# Altium PCB FLX5.PcbDoc (part 2 of 4)
Units mm, origin at the board's own origin, x right, y up, seen from the top; angles counter-clockwise.
Board outline 45.2 x 54.5 mm, 4 copper layers (Top Layer, gndplane, vplane, Bottom Layer), stack 1.596 mm thick; 151 components, 82 nets, 455 pads, 132 vias.
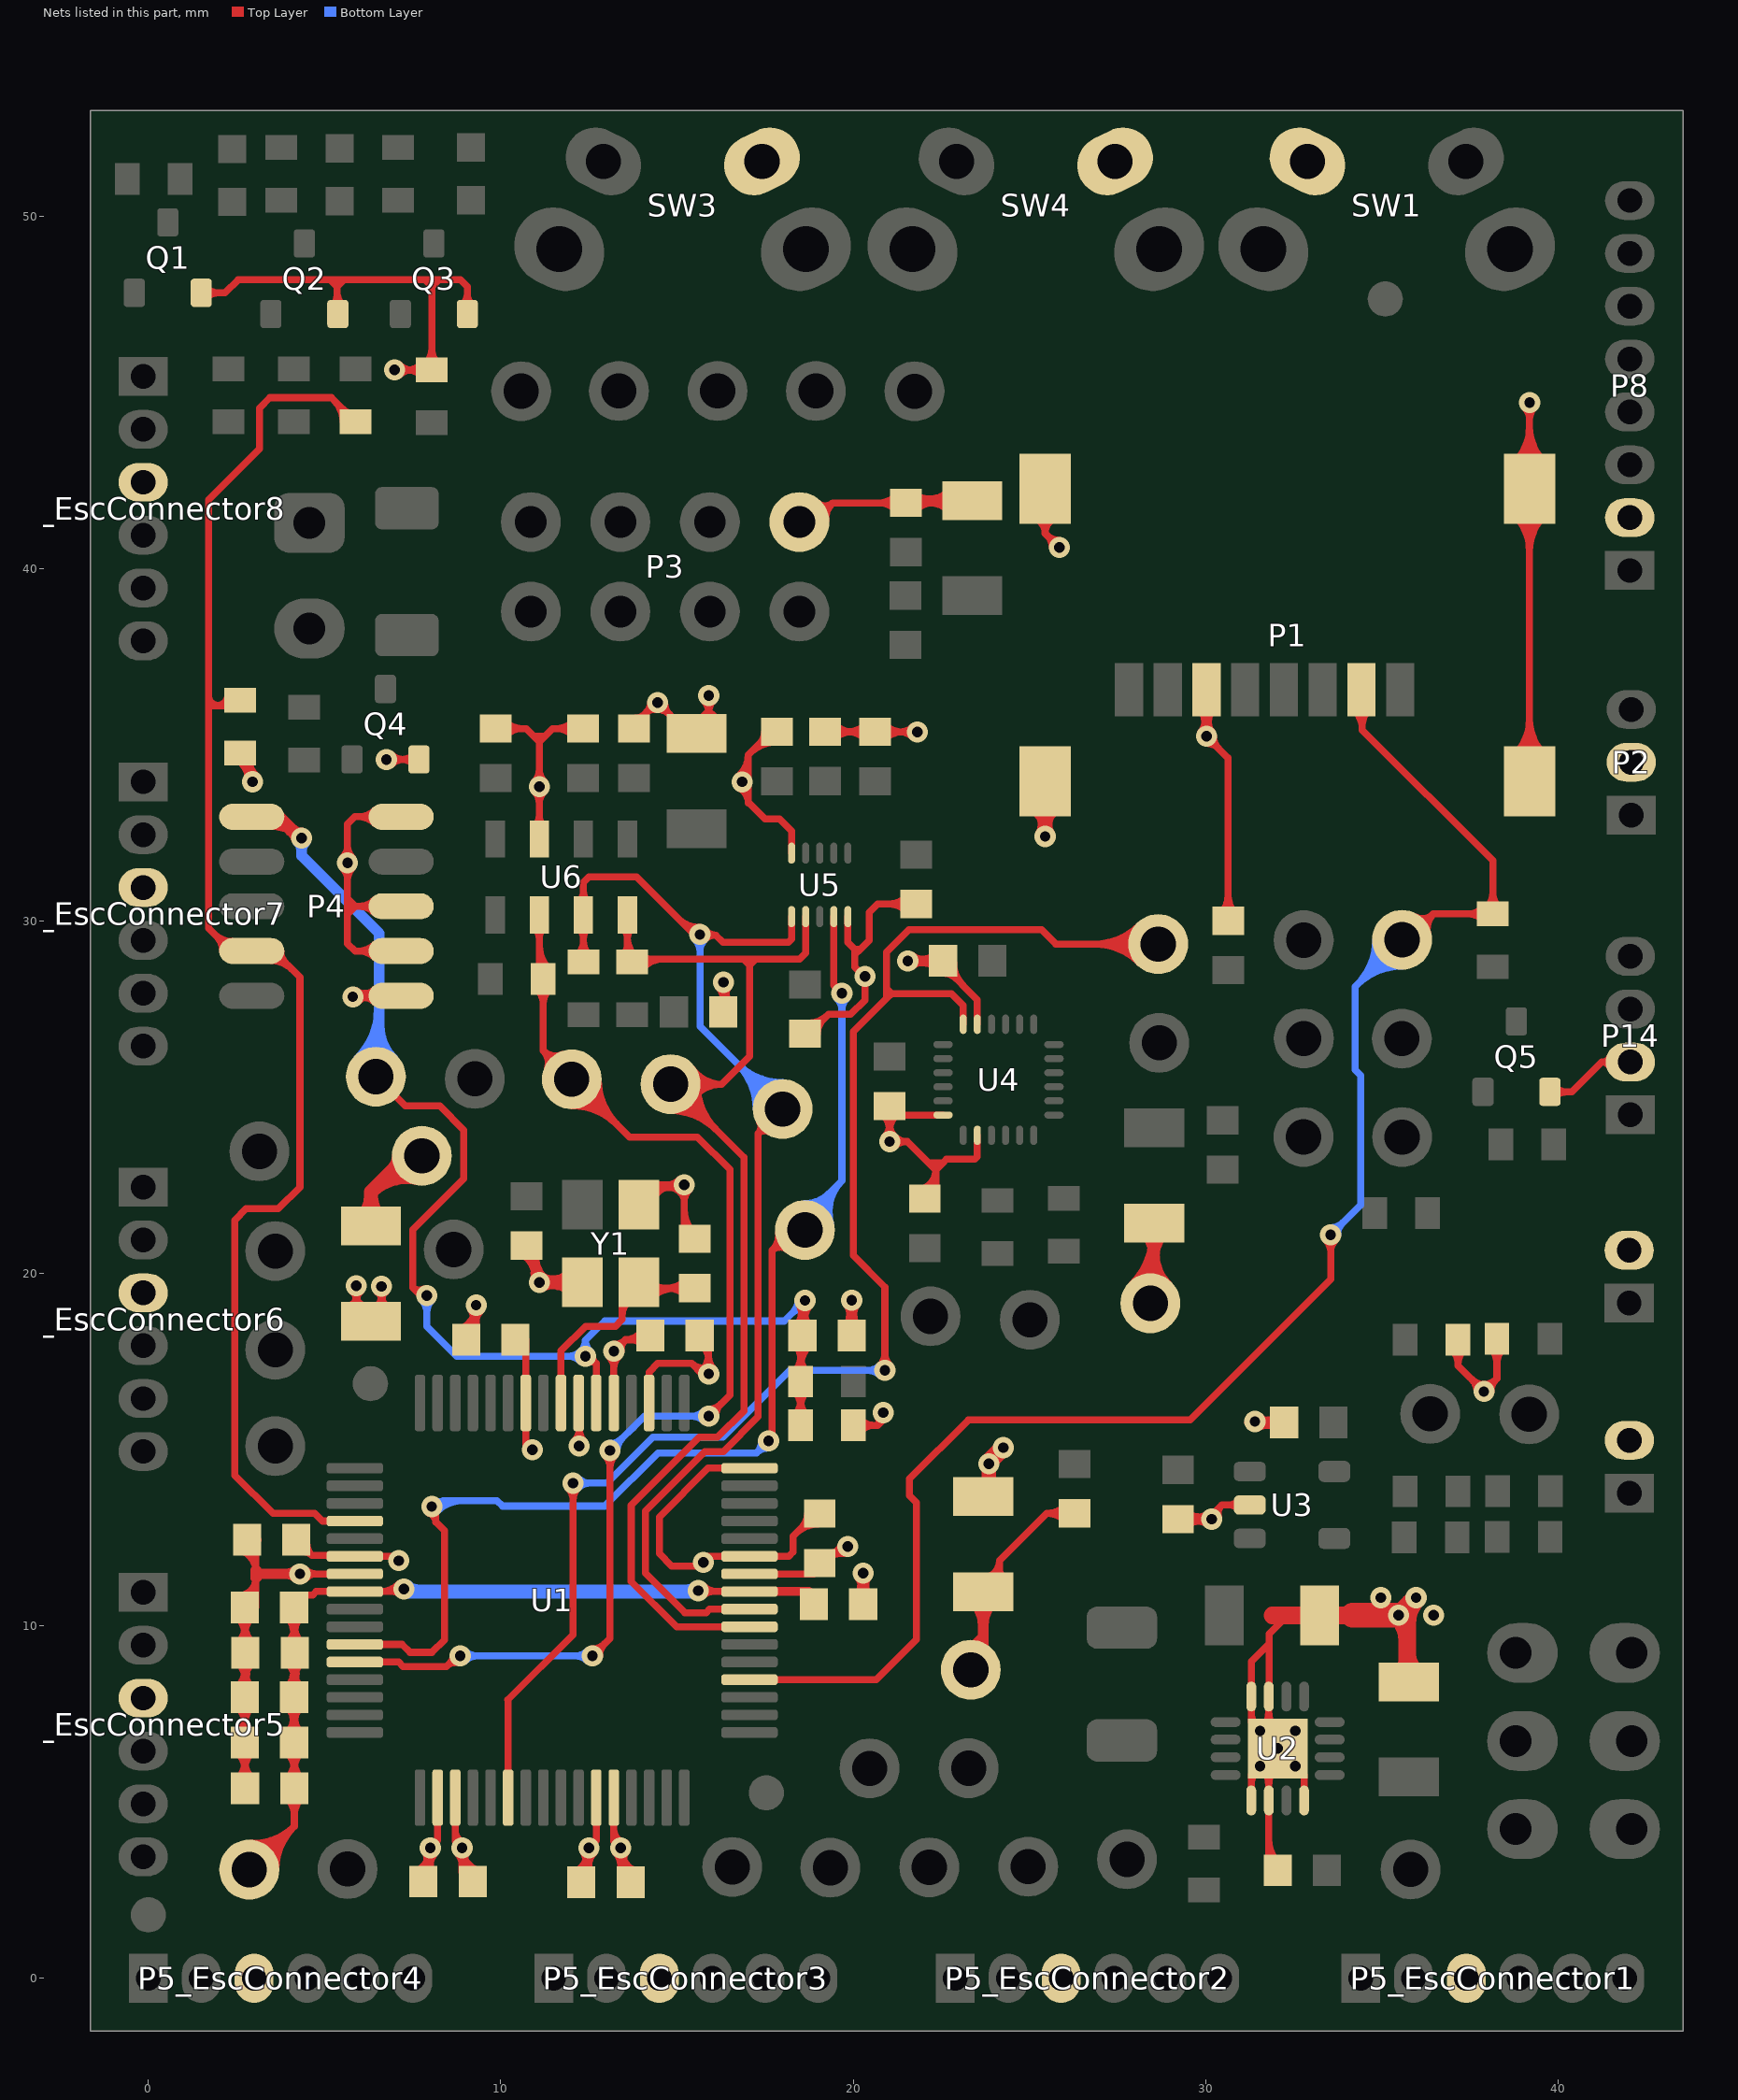
[diagram p4: the nets of this part, all layers, seen from the top]

## Via types
v1: diameter 0.6, hole 0.3, Top Layer to Bottom Layer, 132 vias

## Nets (pads, with @x,y where several pads share a name; then routed paths per layer and width w, separated by ;. In a path a pad name is that pad's centre, name@x,y a point inside that pad or via, vN(x,y) a via of type N, cw(c..) or ccw(c..) an arc to the next point about the centre after c; other vN are vias at no path point) (continued)
DBGLED2: P4.4 R13.2 R15.2 U1.52 | length 46.1
  Top Layer w0.2: 1.707,36.35 ccw(c1.972,36.388) R15.2@2.227,36.307 ; 1.874,29.626 ccw(c2.376,30.128) P4.4@2.376,29.418 ; 1.932,29.568 cw(c1.512,29.148) P4.4@2.106,29.148 ; 2.112,36.112 ccw(c2.112,36.55) R15.2@2.465,36.292 ; R15.2@2.556,36.112 1.718,36.112 1.706,36.1 ; P4.4@3.486,28.878 cw(c3.486,28.067) 4.06,28.64 ; P4.4@3.756,29.148 ccw(c4.248,29.148) 3.9,28.8 ; 5.278,44.761 cw(c4.68,44.164) R13.2@5.525,44.164 ; 5.519,44.52 ccw(c5.775,44.776) R13.2@5.775,44.414 ; U1.52@5.858,12.975 4.939,12.975 4.721,13.192 3.531,13.192 2.45,14.274 2.45,21.512 2.774,21.836 3.686,21.836 4.3,22.45 4.3,28.4 3.552,29.148 P4.4@2.931,29.148 2.882,29.099 2.401,29.099 1.706,29.794 1.706,36.1 ; R13.2@5.875,44.164 5.189,44.85 3.45,44.85 3.15,44.55 3.15,43.4 1.706,41.956 1.706,36.1
GND: C1.2 C2.2 C3.2 C4.2 C5.2 C6.2 C7.2 C8.2 C9.2 C10.2 C11.2 C12.2 C13.2 C14.2 C15.2 C16.2 C17.2 C18.2 C19.2 C20.2 C21.2 C22.2 C23.2 C24.2 C28.2 C29.2 C30.2 C31.1 C32.2 C33.2 C34.2 C35.2 C36.2 C37.2 C38.2 C39.2 C40.2 C41.2 C42.2 JP1.2 MCUG.1 P1.6 P1.MOUNT1 P1.MOUNT2 P1.MOUNT3 P1.MOUNT4 P2.2 P3.1 P4.3 P4.5 P4.9 P5_EscConnector1.3 P5_EscConnector2.3 P5_EscConnector3.3 P5_EscConnector4.3 P5_EscConnector5.3 P5_EscConnector6.3 P5_EscConnector7.3 P5_EscConnector8.3 P8.2 P11.2 P13.2 P14.2 Q1.2 Q2.2 Q3.2 Q4.2 Q5.2 R6.2 R7.2 SENSG.1 SW1.2 SW3.1 SW4.1 U1.3 U1.12 U1.27 U1.32 U1.35 U1.39 U1.55 U2.5 U2.6 U2.8 U2.15 U2.16 U2.17 U3.2 U4.11 U4.18 U4.20 U5.5 U5.10 U6.3 Y1.2 Y1.4 | length 312.1
  Top Layer w0.2: Q1.2@1.5,47.825 2.175,47.825 2.55,48.2 5.15,48.2 ; Q1.2@1.641,47.684 cw(c1.983,47.342) 1.983,47.825 cw(c1.983,48.308) Q1.2@1.641,47.966 ; C4.2@2.52,7.72 cw(c2.004,7.203) 2.734,7.203 ; C4.2@2.52,8.244 ccw(c2.004,8.761) 2.734,8.761 ; C7.2@2.522,6.427 cw(c2.01,5.915) 2.734,5.915 cw(c3.458,5.915) C7.2@2.946,6.427 ; C7.2@2.522,6.952 ccw(c2.01,7.464) 2.734,7.464 ccw(c3.458,7.464) C7.2@2.946,6.952 ; C9.2@2.522,10.263 cw(c2.008,9.75) 2.734,9.75 ; C5.2@2.528,5.652 ccw(c2.031,6.148) 2.734,6.148 ; C6.2@2.538,8.977 cw(c2.064,8.503) 2.734,8.503 ; C6.2@2.538,9.501 ccw(c2.064,9.975) 2.734,9.975 ; C4.2@2.582,8.292 ccw(c2.392,8.622) 2.76,8.523 ; C9.2@2.662,10.866 ccw(c2.54,11.362) 3.05,11.362 C9.2@3.05,10.525 ; C16.2@2.674,12.119 cw(c2.411,11.537) 3.05,11.537 ; C9.2@2.71,10.672 ccw(c2.603,11.107) 3.05,11.107 ; 2.734,6.179 ccw(c3.48,6.179) C5.2@2.953,5.652 ; 2.734,7.212 cw(c3.452,7.212) C4.2@2.944,7.72 ; C4.2@2.734,8.427 cw(c3.513,8.427) C6.2@2.962,8.977 ; 2.734,8.752 ccw(c3.452,8.752) C4.2@2.944,8.244 ; 2.734,9.752 cw(c3.457,9.752) C9.2@2.946,10.263 ; 2.734,10.052 ccw(c3.513,10.052) C6.2@2.962,9.501 ; C9.2@2.734,10.525 2.734,9.239 C7.2@2.734,6.689 2.734,5.396 C5.2@2.74,5.389 ; C16.2@2.756,12.301 cw(c2.551,11.846) 3.05,11.846 ; C9.2@2.758,10.478 ccw(c2.666,10.851) C9.2@3.05,10.851 ; 2.793,8.648 ccw(c3.147,8.553) C4.2@2.919,8.267 ; 3.05,11.575 3.05,12.379 C16.2@3.113,12.442 ; v1(4.3,11.475) v1@4.401,11.375 ; v1@4.401,11.475 U1.55@5.858,11.475 ; v1@4.441,11.334 cw(c4.782,10.994) 4.782,11.475 ; v1@4.441,11.617 ccw(c4.784,11.959) 4.784,11.475 ; Q2.2@5.234,47.466 ccw(c4.953,47.747) 5.35,47.747 ; 5.35,47.868 ccw(c5.918,47.868) Q2.2@5.516,47.466 ; Q2.2@5.375,47.225 5.35,47.25 5.35,48 ; v1@5.509,31.509 cw(c5.167,31.167) 5.65,31.167 cw(c6.133,31.167) v1@5.791,31.509 ; v1@5.509,31.791 ccw(c5.167,32.133) 5.65,32.133 ccw(c6.133,32.133) v1@5.791,31.791 ; 5.764,30.418 5.875,30.418 ; P4.3@6.427,28.957 ccw(c5.966,28.496) 5.966,29.148 ccw(c5.966,29.8) P4.3@6.427,29.339 ; P4.5@6.427,30.227 ccw(c5.966,29.766) 5.966,30.418 ccw(c5.966,31.07) P4.5@6.427,30.609 ; P4.9@6.427,32.767 ccw(c5.966,32.306) 5.966,32.958 ccw(c5.966,33.61) P4.9@6.427,33.149 ; v1(6.753,34.585) Q4.2@7.677,34.585 ; v1@6.894,34.443 cw(c7.235,34.102) 7.235,34.585 cw(c7.235,35.068) v1@6.894,34.726 ; v1(6.986,45.636) JP1.2@8.04,45.636 8.04,48 ; v1@7.128,45.495 cw(c7.469,45.153) 7.469,45.636 cw(c7.469,46.119) v1@7.128,45.778 ; P4.3@7.173,29.148 5.865,29.148 5.65,29.363 5.65,30.193 ; P4.5@7.173,30.418 5.875,30.418 ; P4.9@7.173,32.958 5.858,32.958 5.65,32.75 v1(5.65,31.65) 5.65,30.643 ; Q4.2@7.536,34.443 ccw(c7.194,34.102) 7.194,34.585 ccw(c7.194,35.068) Q4.2@7.536,34.726 ; JP1.2@7.764,45.459 ccw(c7.337,45.033) 7.337,45.636 ccw(c7.337,46.24) JP1.2@7.764,45.813 ; JP1.2@7.864,45.813 ccw(c7.437,46.24) 8.04,46.24 ccw(c8.644,46.24) JP1.2@8.217,45.813 ; 8.04,48.032 8.04,48.2 ; 8.208,48.2 8.04,48.2 ; U1.3@8.708,5.125 8.708,3.892 v1(8.9,3.7) ; 8.715,4.102 ccw(c9.073,4.215) v1@9.041,3.841 ; v1@8.759,3.559 cw(c8.417,3.217) 8.9,3.217 cw(c9.383,3.217) v1@9.041,3.559 ; v1@8.845,3.508 cw(c8.788,3.305) 8.991,3.359 cw(c9.195,3.414) v1@9.044,3.561 ; C12.2@8.884,18.433 ccw(c8.557,19.1) v1(9.3,19.1) 9.3,18.397 C12.2@9.016,18.114 C12.2@9.264,18.114 ; C42.2@8.9,3.098 ccw(c9.329,3.098) C42.2@9.163,2.703 ; 8.9,3.399 ccw(c9.455,3.399) C42.2@9.24,2.887 ; Q3.2@8.909,47.466 ccw(c8.567,47.808) 9.05,47.808 ccw(c9.533,47.808) Q3.2@9.191,47.466 ; C12.2@8.972,18.254 ccw(c8.715,18.779) 9.3,18.779 ; Q3.2@9.05,47.225 9.05,48 8.85,48.2 8.24,48.2 8.04,48 ; C12.2@9.06,18.074 ccw(c8.872,18.458) C12.2@9.3,18.458 ; v1@9.147,18.972 cw(c8.94,18.798) 9.201,18.729 cw(c9.461,18.659) v1@9.368,18.912 ; v1@9.159,18.959 cw(c8.817,18.617) 9.3,18.617 cw(c9.783,18.617) v1@9.441,18.959 ; C42.2@9.186,2.721 8.9,3.007 v1(8.9,3.7) ; C42.2@9.318,3.072 cw(c9.581,3.7) v1(8.9,3.7) ; C40.2@9.851,35.459 10.717,35.459 10.935,35.242 ; C40.2@10.113,35.247 cw(c10.625,34.735) 10.625,35.459 cw(c10.625,36.184) C40.2@10.113,35.671 ; C18.2@10.612,20.541 cw(c10.126,19.824) v1@10.992,19.824 ; C18.2@10.724,20.706 cw(c10.382,20.201) 10.992,20.201 ; C18.2@10.73,20.789 10.992,20.528 10.992,19.848 v1(11.092,19.748) Y1.4@12.316,19.748 ; v1@10.919,19.848 ccw(c10.728,19.958) 10.941,20.015 ; v1@10.951,33.674 cw(c10.61,33.333) 11.092,33.333 cw(c11.575,33.333) v1@11.234,33.674 ; v1@10.951,33.957 ccw(c10.61,34.299) 11.092,34.299 ccw(c11.575,34.299) v1@11.234,33.957 ; U6.3@10.969,32.696 ccw(c10.67,32.994) 11.092,32.994 ccw(c11.515,32.994) U6.3@11.216,32.696 ; C18.2@10.992,20.472 ccw(c11.816,20.472) 11.233,19.889 ccw(c11.575,20.23) 11.575,19.748 ccw(c11.575,19.265) v1@11.233,19.606 ; U6.3@11.092,32.322 v1(11.092,33.816) 11.092,35.084 ; v1@11.192,19.574 cw(c11.467,19.097) 11.61,19.629 ; v1@11.192,19.921 ccw(c11.467,20.398) 11.61,19.866 ; v1@11.265,19.648 cw(c11.624,19.44) 11.517,19.841 ; v1@11.265,19.848 ccw(c11.624,20.055) 11.517,19.654 ; Y1.4@11.98,19.412 ccw(c11.169,18.601) 11.169,19.748 ccw(c11.169,20.894) Y1.4@11.98,20.084 ; C38.2@12.071,35.247 ccw(c11.559,34.735) 11.559,35.459 ccw(c11.559,36.184) C38.2@12.071,35.671 ; v1@12.084,15.241 ccw(c11.742,15.583) 12.225,15.583 ccw(c12.708,15.583) v1@12.366,15.241 ; Y1.4@12.121,19.553 ccw(c11.652,19.084) 11.652,19.748 ccw(c11.652,20.412) Y1.4@12.121,19.942 ; U1.39@12.173,15.639 cw(c12.047,15.513) 12.225,15.513 ; U1.39@12.208,16.325 12.225,16.308 v1(12.225,15.1) ; C38.2@12.333,35.459 11.467,35.459 11.25,35.242 ; 13.208,4.163 ccw(c13.863,4.163) v1(13.4,3.7) ; U1.12@13.208,5.125 13.208,3.892 v1(13.4,3.7) ; 13.218,4.164 ccw(c13.581,4.204) v1@13.541,3.841 ; v1@13.259,3.559 cw(c12.917,3.217) 13.4,3.217 cw(c13.883,3.217) v1@13.541,3.559 ; v1@13.334,3.511 cw(c13.25,3.269) 13.498,3.336 cw(c13.745,3.402) v1@13.551,3.569 ; C15.2@13.4,3.066 ccw(c13.826,3.066) C15.2@13.643,2.681 ; 13.4,3.383 ccw(c13.978,3.383) C15.2@13.729,2.862 ; C15.2@13.686,2.721 13.4,3.007 v1(13.4,3.7) ; C41.2@13.783,35.459 14.108,35.784 14.108,35.899 ; Y1.2@13.798,22.114 cw(c14.36,21.917) Y1.2@14.36,22.513 ; C15.2@13.815,3.042 cw(c14.129,3.7) v1(13.4,3.7) ; C41.2@13.833,35.759 ccw(c13.833,36.087) C41.2@14.065,35.855 ; Y1.2@13.881,22.513 v1(15.205,22.513) C17.2@15.205,21.286 ; C41.2@13.933,35.46 cw(c14.566,35.462) 14.118,35.909 ; Y1.2@13.986,22.048 cw(c14.642,21.819) 14.642,22.513 ; C41.2@14.082,35.627 cw(c14.26,35.747) 14.108,35.899 ; 14.137,35.928 ccw(c13.865,36.2) v1@14.25,36.2 ; Y1.2@14.175,21.982 cw(c14.924,21.721) v1@14.924,22.513 ; U1.35@14.208,16.325 14.208,17.204 14.454,17.45 15.413,17.45 15.713,17.15 v1(15.9,17.15) 15.9,18.089 C13.2@15.392,18.089 ; v1@14.421,36.002 ccw(c14.367,35.64) 14.108,35.899 ; Y1.2@14.438,22.28 cw(c14.776,22.011) v1@15.129,22.26 ; v1@14.45,36 cw(c14.45,35.517) 14.791,35.859 cw(c15.133,36.2) v1@14.65,36.2 ; v1(14.45,36.2) 15.328,35.322 C39.2@15.559,35.322 ; v1@14.458,36.249 14.108,35.899 ; 14.649,22.44 cw(c14.779,21.954) v1@15.084,22.354 ; C39.2@14.788,35.862 cw(c14.255,35.328) C39.2@15.009,35.323 ; 14.89,22.504 ccw(c14.83,22.73) v1@15.032,22.613 ; v1@15.064,22.655 cw(c14.722,22.996) 14.722,22.513 cw(c14.722,22.031) 15.064,22.372 cw(c14.722,22.031) 15.205,22.031 cw(c15.688,22.031) v1@15.347,22.372 ; C17.2@15.205,21.348 ccw(c15.817,21.348) C17.2@15.385,20.915 ; 15.205,21.831 ccw(c16.3,21.831) C17.2@15.526,21.057 ; 15.413,17.45 ccw(c15.719,17.755) v1@15.843,17.342 ; C39.2@15.584,35.123 15.9,35.438 15.9,35.96 ; C13.2@15.585,18.101 cw(c15.169,17.5) 15.9,17.5 ; C39.2@15.695,35.51 ccw(c15.303,35.96) 15.9,35.96 ; C39.2@15.7,35.75 15.7,35.761 15.9,35.96 ; v1@15.727,17.25 ccw(c15.162,17.716) 15.89,17.634 ; v1@15.758,17.291 ccw(c15.417,17.633) 15.9,17.633 ccw(c16.383,17.633) v1@16.041,17.291 ; v1@15.758,36.258 cw(c15.417,35.917) 15.9,35.917 cw(c16.383,35.917) v1@16.041,36.258 ; v1(15.9,36.4) 15.9,35.96 ; C39.2@16.05,35.784 16.05,35.81 15.9,35.96 ; v1@16.174,28.122 cw(c15.833,27.781) 16.316,27.781 cw(c16.799,27.781) v1@16.457,28.122 ; v1@16.225,28.085 cw(c16.064,27.771) 16.405,27.863 cw(c16.69,27.939) v1@16.467,28.133 ; C33.2@16.316,27.421 v1(16.316,28.264) ; v1@16.727,34.106 ccw(c16.251,34.716) 17.024,34.716 ; v1@16.762,33.769 cw(c16.558,33.35) 17.024,33.35 ; 17.024,33.67 ccw(c16.714,33.67) v1(16.85,33.949) ccw(c16.571,34.306) 17.024,34.306 ; U1.32@17.058,14.475 15.881,14.475 14.5,13.094 14.5,12.051 14.851,11.7 15.65,11.7 v1(15.75,11.8) 15.752,11.8 15.775,11.823 15.775,11.95 15.75,11.975 U1.27@17.058,11.975 18.175,11.975 18.3,12.1 18.3,12.55 C14.2@18.75,13 ; 17.085,34.776 cw(c17.783,34.077) C37.2@17.783,35.066 ; 17.349,35.04 ccw(c17.023,35.366) C37.2@17.483,35.366 ; C37.2@17.426,35.118 cw(c17.783,34.76) C37.2@17.783,35.266 ; C37.2@17.674,35.366 17.024,34.716 ; U5.5@18.251,31.925 18.251,32.557 17.908,32.9 17.5,32.9 17.024,33.376 17.024,34.716 ; 18.375,12.625 cw(c19,11.999) C14.2@19,12.884 ; P3.1@18.474,41.322 18.872,41.322 19.416,41.866 ; 18.535,12.785 ccw(c18.136,13.184) C14.2@18.7,13.184 ; C32.2@18.633,26.8 18.75,26.8 19.3,27.35 ; C32.2@18.687,27.1 ccw(c18.696,27.954) 19.3,27.35 ; P3.1@18.856,41.718 ccw(c19.062,41.931) 19.272,41.722 ; C32.2@18.983,26.8 cw(c19.546,26.8) 19.148,27.198 ; P3.1@18.995,41.862 ccw(c19.203,42.078) 19.416,41.866 ; C35.2@19.199,35.373 C34.2@20.622,35.366 v1(21.824,35.366) ; P3.1@19.223,41.362 cw(c19.883,41.398) 19.416,41.866 ; C35.2@19.46,35.16 cw(c19.969,34.646) 19.973,35.369 ; C35.2@19.462,35.584 ccw(c19.977,36.094) 19.974,35.369 ; C19.2@19.746,18.501 ccw(c19.234,19.013) 19.959,19.013 ccw(c20.683,19.013) C19.2@20.171,18.501 ; v1@19.806,19.111 cw(c19.503,18.853) 19.888,18.75 ; v1@19.817,19.099 cw(c19.476,18.758) 19.959,18.758 cw(c20.441,18.758) v1@20.1,19.099 ; 19.847,35.37 cw(c19.844,34.645) C34.2@20.359,35.155 ; 19.849,35.37 ccw(c19.852,36.093) C34.2@20.361,35.579 ; U5.10@19.851,30.125 19.851,29.399 20.05,29.2 20.05,29.05 ; v1@19.859,19.068 cw(c19.718,18.824) 19.99,18.897 ; 19.927,18.897 cw(c20.199,18.824) v1@20.059,19.068 ; C19.2@19.959,18.239 v1(19.959,19.241) ; 20.029,18.75 cw(c20.414,18.853) v1@20.111,19.111 ; 20.05,29.201 20.201,29.201 ; C8.2@20.072,10.873 ccw(c19.559,11.385) 20.284,11.385 ccw(c21.008,11.385) C8.2@20.496,10.873 ; v1@20.132,11.365 cw(c19.904,11.158) 20.202,11.079 ; v1@20.138,11.359 cw(c19.788,11.008) C8.2@20.284,11.008 ; v1@20.18,11.327 cw(c19.983,10.986) 20.363,11.088 ; 20.208,11.103 cw(c20.564,11.007) v1@20.38,11.327 ; C8.2@20.284,10.611 v1@20.284,11.5 ; C8.2@20.284,11.026 cw(c20.754,11.026) v1@20.421,11.359 ; 20.369,11.067 cw(c20.701,11.156) v1@20.435,11.373 ; v1@20.458,28.432 v1(20.336,28.432) ; C30.2@20.823,24.539 cw(c20.311,24.026) 21.035,24.026 cw(c21.759,24.026) C30.2@21.247,24.539 ; C34.2@20.884,35.154 cw(c21.397,34.642) 21.397,35.366 cw(c21.397,36.09) C34.2@20.884,35.578 ; v1@20.894,23.883 ccw(c20.552,24.225) 21.035,24.225 ccw(c21.518,24.225) 21.176,23.883 ccw(c21.518,24.225) 21.518,23.742 ccw(c21.518,23.259) v1@21.176,23.6 ; v1@20.935,23.915 ccw(c20.819,24.115) 21.043,24.055 ; 21.027,24.055 ccw(c21.251,24.115) v1@21.135,23.915 ; C2.2@21.233,41.653 ccw(c20.721,41.141) 20.721,41.866 ccw(c20.721,42.59) C2.2@21.233,42.078 ; C36.2@21.521,30.27 ccw(c21.009,29.758) 21.009,30.482 ccw(c21.009,31.206) C36.2@21.521,30.694 ; v1(21.55,28.868) C31.1@22.25,28.868 ; v1@21.679,28.715 cw(c21.957,28.388) 22.068,28.803 ; v1@21.679,29.02 ccw(c21.957,29.348) 22.068,28.933 ; v1@21.683,35.224 ccw(c21.341,34.883) 21.341,35.366 ccw(c21.341,35.849) v1@21.683,35.507 ; v1@21.691,28.726 cw(c22.033,28.385) 22.033,28.868 cw(c22.033,29.351) v1@21.691,29.009 ; C2.2@21.713,42.114 ccw(c22.157,42.774) 22.363,42.006 ; v1@21.723,28.768 cw(c21.93,28.648) 21.868,28.879 ; v1@21.723,28.968 ccw(c21.93,29.087) 21.868,28.856 ; C2.2@21.758,41.653 cw(c22.27,41.141) 22.27,41.866 cw(c22.27,42.59) C2.2@21.758,42.078 ; C36.2@21.783,30.482 20.69,30.482 20.458,30.25 20.458,29.455 20.204,29.201 20.201,29.201 ; C2.2@21.805,41.716 cw(c22.207,41.484) 22.087,41.932 ; C2.2@21.84,41.866 ccw(c21.84,43.168) C3.2@22.76,42.247 ; C28.2@21.973,22.402 ccw(c21.754,22.956) 22.35,22.956 C28.2@22.35,22.123 ; C28.2@22.046,22.216 ccw(c21.87,22.662) 22.35,22.662 ; 22.145,41.866 cw(c22.145,40.995) C3.2@22.76,41.611 ; 22.15,23.142 22.151,23.141 22.549,23.141 ; 22.323,41.866 ccw(c22.323,42.685) C3.2@22.902,42.106 ; 22.336,22.942 21.536,23.742 v1(21.035,23.742) C30.2@21.035,24.751 21.29,24.496 U4.18@22.549,24.496 ; C31.1@22.336,28.651 22.641,28.651 23.524,27.768 U4.11@23.524,27.071 ; C31.1@22.338,28.656 ccw(c21.826,28.144) 21.826,28.868 ccw(c21.826,29.592) C31.1@22.338,29.08 ; 22.35,22.942 22.549,23.141 ; C31.1@22.55,28.518 cw(c22.55,27.977) 22.932,28.36 ; C31.1@22.85,28.818 ccw(c23.758,28.818) 23.116,28.176 ; C3.2@23.305,41.514 22.953,41.866 C2.2@21.495,41.866 19.416,41.866 ; U4.20@23.524,23.921 23.524,23.316 23.45,23.242 22.65,23.242 22.549,23.141 ; P1.MOUNT2@25.06,33.197 cw(c24.431,32.4) v1(25.447,32.4) ; P1.MOUNT1@25.18,41.423 cw(c24.983,41.003) 25.447,41.003 ; P1.MOUNT2@25.184,33.355 cw(c24.756,32.812) 25.447,32.812 cw(c26.137,32.812) P1.MOUNT2@25.71,33.355 ; v1@25.273,32.5 ccw(c24.855,32.741) 25.322,32.866 ccw(c25.788,32.991) v1@25.547,32.573 ; v1@25.305,32.541 ccw(c24.964,32.883) 25.447,32.883 ccw(c25.929,32.883) v1@25.588,32.541 ; v1@25.347,32.573 ccw(c25.105,32.991) 25.572,32.866 ccw(c26.038,32.741) v1@25.62,32.5 ; P1.MOUNT2@25.447,33.963 v1(25.447,32.4) ; P1.MOUNT1@25.447,42.263 25.447,41.003 ; v1@25.65,40.6 ccw(c25.167,40.6) 25.509,40.941 ccw(c25.85,41.283) v1@25.85,40.8 ; P1.MOUNT1@25.713,41.423 ccw(c25.91,41.003) 25.447,41.003 ; P1.MOUNT2@25.833,33.197 ccw(c26.462,32.4) v1(25.447,32.4) ; v1(25.85,40.6) 25.447,41.003 ; C21.2@29.22,13.029 v1(30.177,13.029) 30.177,13.145 30.464,13.432 ; C21.2@29.482,12.817 cw(c29.994,12.305) 29.994,13.029 cw(c29.994,13.753) C21.2@29.482,13.241 ; 29.712,12.953 cw(c29.807,12.596) v1@30.047,12.877 ; 29.712,13.105 ccw(c29.807,13.462) v1@30.047,13.181 ; 29.809,12.979 ccw(c29.726,13.29) v1@30.004,13.129 ; 29.809,13.079 cw(c29.726,12.768) v1@30.004,12.929 ; P1.6@29.814,36.001 cw(c29.302,35.489) 30.027,35.489 cw(c30.751,35.489) P1.6@30.239,36.001 ; v1@29.874,35.371 ccw(c29.561,35.637) 29.958,35.744 ; v1@29.885,35.382 ccw(c29.544,35.724) 30.027,35.724 ccw(c30.509,35.724) v1@30.168,35.382 ; v1@29.927,35.414 ccw(c29.795,35.643) 30.049,35.574 ; 30.004,35.574 ccw(c30.258,35.643) v1@30.127,35.414 ; v1@30.027,35.041 cw(c30.027,34.558) 30.368,34.9 cw(c30.709,35.241) v1@30.227,35.241 ; P1.6@30.027,36.563 v1(30.027,35.241) 30.641,34.627 C1.2@30.641,30.005 ; v1@30.036,12.888 ccw(c29.694,12.546) 29.694,13.029 ccw(c29.694,13.512) v1@30.036,13.17 ; 30.095,35.744 ccw(c30.492,35.637) v1@30.179,35.371 ; v1@30.37,13.081 cw(c30.72,13.176) 30.464,13.432 ; C1.2@30.429,30.217 ccw(c29.916,30.729) 30.641,30.729 ccw(c31.365,30.729) C1.2@30.853,30.217 ; U3.2@30.957,13.308 ccw(c30.658,13.009) 30.658,13.432 ccw(c30.658,13.854) U3.2@30.957,13.555 ; v1@31.2,15.769 v1@31.35,15.769 ; U3.2@31.255,13.432 30.464,13.432 ; U2.5@31.296,5.046 31.296,5.771 v1(31.546,6.021) ; U2.5@31.296,5.462 cw(c32.046,5.462) v1(31.546,6.021) ; 31.296,5.528 cw(c32.144,5.528) U2.17@32.061,6.372 ; 31.296,7.563 ccw(c32.008,7.563) v1(31.546,7.021) ; U2.17@31.306,5.788 cw(c31.622,5.703) v1(31.546,6.021) ; v1(31.4,15.8) 31.381,15.8 v1@31.35,15.769 ; v1@31.5,15.627 cw(c31.737,15.215) C22.2@31.86,15.674 ; v1@31.541,15.658 cw(c31.809,15.391) 31.809,15.769 ; v1@31.541,15.941 ccw(c31.957,16.357) C22.2@31.957,15.769 ; v1@31.563,15.916 ccw(c31.722,16.029) 31.772,15.841 ; v1@31.573,15.7 cw(c31.823,15.556) 31.748,15.834 ; v1@31.573,15.9 ccw(c31.998,16.145) C22.2@31.871,15.671 ; C24.2@31.796,3.478 ccw(c32.411,3.478) C24.2@31.976,3.043 ; 31.796,3.961 ccw(c32.893,3.961) C24.2@32.117,3.185 ; U2.6@31.796,5.435 cw(c33.132,5.435) U2.17@32.187,6.38 ; U2.6@31.796,5.462 ccw(c31.046,5.462) v1(31.546,6.021) ; U2.17@31.796,6.271 U2.6@31.796,5.046 31.796,3.315 C24.2@31.832,3.278 ; U2.17@31.796,6.771 U2.15@31.796,7.996 ; 31.796,7.563 cw(c31.084,7.563) v1(31.546,7.021) ; U2.15@31.796,7.607 ccw(c33.132,7.607) U2.17@32.187,6.662 ; U2.15@31.8,8 31.8,9.5 ; C22.2@32.018,15.557 ccw(c31.506,15.045) 31.506,15.769 ccw(c31.506,16.493) C22.2@32.018,15.981 ; 32.2,10.175 31.8,9.775 31.8,9.5 ; C22.2@32.23,15.769 v1@31.35,15.769 ; v1(32.546,6.021) 32.796,5.771 U2.8@32.796,5.046 ; R6.2@36.99,17.848 cw(c36.563,17.421) 37.167,17.421 cw(c37.77,17.421) R6.2@37.344,17.848 ; R6.2@37.167,18.125 37.167,17.383 v1(37.9,16.65) 38.27,17.02 R7.2@38.27,18.15 ; v1@37.7,16.65 ccw(c37.217,16.65) 37.559,16.991 ccw(c37.9,17.333) 37.9,16.85 ccw(c37.9,17.333) 38.241,16.991 ccw(c38.583,16.65) v1@38.1,16.65 ; R7.2@38.093,17.874 cw(c37.666,17.447) 38.27,17.447 cw(c38.873,17.447) R7.2@38.446,17.874 ; P1.MOUNT3@38.755,34.68 ccw(c37.688,35.747) 39.197,35.747 ccw(c40.705,35.747) P1.MOUNT3@39.639,34.68 ; P1.MOUNT4@38.755,41.546 cw(c37.688,40.479) 39.197,40.479 cw(c40.705,40.479) P1.MOUNT4@39.639,41.546 ; P1.MOUNT4@38.755,42.98 ccw(c37.688,44.047) 39.197,44.047 ccw(c40.705,44.047) P1.MOUNT4@39.639,42.98 ; P1.MOUNT3@38.896,34.539 ccw(c38.171,35.264) 39.197,35.264 ccw(c40.223,35.264) P1.MOUNT3@39.497,34.539 ; P1.MOUNT4@38.896,41.688 cw(c38.171,40.962) 39.197,40.962 cw(c40.223,40.962) P1.MOUNT4@39.497,41.688 ; P1.MOUNT4@38.896,42.839 ccw(c38.171,43.564) 39.197,43.564 ccw(c40.223,43.564) P1.MOUNT4@39.497,42.839 ; v1@39.055,44.573 cw(c38.714,44.231) 39.197,44.231 cw(c39.679,44.231) v1@39.338,44.573 ; v1@39.186,44.725 v1(39.197,44.714) P1.MOUNT4@39.197,42.938 ; P1.MOUNT3@39.197,33.963 P1.MOUNT4@39.197,42.263 ; Q5.2@39.773,25.153 40.403,25.153 41.25,26 ; Q5.2@39.914,25.011 cw(c40.256,24.67) 40.256,25.153 cw(c40.256,25.636) Q5.2@39.914,25.294 ; P14.2@41.484,25.839 ccw(c41.25,25.75) 41.25,26 ; P14.2@41.484,26.161 cw(c41.25,26.25) 41.25,26 ; P14.2@42.054,26 41.25,26 ; 5.15,48.2 5.35,48.2 ; 5.15,48.2 5.35,48 ; 5.35,48 5.55,48.2 ; 5.35,48 5.35,48.2 ; 5.35,48.2 5.55,48.2 ; 5.55,48.2 7.84,48.2 ; 5.65,30.193 5.875,30.418 ; 5.65,30.193 5.65,30.643 ; 5.65,30.643 5.875,30.418 ; 7.84,48.2 8.04,48.2 ; 7.84,48.2 8.04,48 ; 10.935,35.242 11.092,35.084 ; 10.935,35.242 11.25,35.242 ; 11.092,35.084 11.25,35.242 ; 19.3,27.35 19.928,27.35 20.336,27.757 v1(20.336,28.432) ; 20.05,29.05 20.05,28.7 20.318,28.432 v1(20.336,28.432) ; 20.05,29.05 20.201,29.201 ; v1(31.546,7.021) 31.296,7.271 U2.16@31.296,7.996 31.296,8.996 31.8,9.5
  Top Layer w0.3: v1@4.194,11.369 ccw(c3.938,11.113) 3.938,11.475 ccw(c3.938,11.837) v1@4.194,11.581 ; v1(4.3,11.475) 3.163,11.475 ; SENSG.1@27.939,19.649 ccw(c26.48,21.108) C29.2@28.544,21.108 ; SENSG.1@28.152,19.437 ccw(c27.205,20.384) 28.544,20.384 ; C29.2@28.261,21.149 cw(c27.578,20.466) 28.544,20.466 cw(c29.509,20.466) C29.2@28.827,21.149 ; SENSG.1@28.392,18.854 28.544,19.006 C29.2@28.544,21.231 ; 28.544,20.579 ccw(c29.86,20.579) SENSG.1@28.929,19.649 ; 3.163,11.475 3.05,11.362 3.05,11.575 3.15,11.475 3.163,11.475
  Top Layer w0.4: C10.2@6.069,21.594 ccw(c5.471,22.192) 6.316,22.192 ccw(c7.161,22.192) C10.2@6.564,21.594 ; C10.2@6.308,21.355 C10.2@6.316,21.347 6.316,22.316 7.338,23.338 MCUG.1@7.758,23.338 ; 6.316,22.316 cw(c7.324,21.309) MCUG.1@7.622,22.702 ; 6.837,22.837 cw(c7.507,22.166) MCUG.1@7.706,23.093 ; 6.945,22.945 ccw(c6.553,23.338) MCUG.1@7.108,23.338 ; C11.2@23.692,13.668 23.851,13.827 v1@23.851,14.599
  Top Layer w0.5: v1@23.851,14.599 23.851,14.648 v1(24.261,15.058) v1@24.261,15.011 ; 31.9,10.3 C23.2@33.233,10.3 34.175,10.3 ; v1@35.44,10.265 cw(c34.76,9.585) 35.721,9.585 ; v1@35.446,10.3 35.721,10.575 C20.2@35.721,8.414 ; C20.2@35.559,8.626 ccw(c35.167,9.017) 35.721,9.017 ; 35.721,9.259 ccw(c36.616,9.259) C20.2@35.983,8.626 ; 35.721,10.066 cw(c36.709,10.066) v1@36.01,10.765 ; v1@35.721,10.461 cw(c36.012,10.461) v1@35.98,10.75
  Top Layer w0.7: 34.175,10.3 v1@35.446,10.3
  other v1: 32.046,6.521 32.546,7.021 35.475,10.3 36.475,10.3 34.975,10.8 35.975,10.8 20.28,11.5 23.85,14.6
I2C1SCL: R25.2 SCLo.1 U1.23 U5.7 U6.8 | length 44.7
  Top Layer w0.2: R25.2@13.455,29.014 ccw(c13.123,29.346) 13.592,29.346 ; U6.8@13.469,29.798 cw(c13.17,29.499) 13.592,29.499 cw(c14.015,29.499) U6.8@13.716,29.798 ; 13.592,29.536 ccw(c14.33,29.536) R25.2@13.808,29.014 ; U6.8@13.592,30.172 13.592,28.925 16.883,28.925 ; R25.2@14.008,28.661 cw(c14.647,28.022) 14.647,28.925 ; R25.2@14.008,29.014 ccw(c14.224,29.229) 14.224,28.925 ; SCLo.1@14.807,25.127 SCLo.1@15.063,25.127 ; SCLo.1@14.819,24.621 cw(c14.819,22.811) 16.099,24.091 cw(c17.38,25.371) SCLo.1@15.569,25.371 ; SCLo.1@14.819,24.821 cw(c14.819,23.494) 15.758,24.432 cw(c16.697,25.371) SCLo.1@15.369,25.371 ; SCLo.1@15.268,25.053 cw(c15.884,24.615) 15.884,25.371 cw(c15.884,26.127) SCLo.1@15.268,25.69 ; SCLo.1@15.431,24.937 cw(c16.271,24.34) 16.271,25.371 ; SCLo.1@15.431,25.806 ccw(c16.271,26.402) 16.271,25.371 ; U1.23@17.058,9.975 14.99,9.975 13.7,11.265 13.7,13.425 15.625,15.35 16.148,15.35 16.9,16.101 16.9,23.291 SCLo.1@15.063,25.127 ; U5.7@18.651,30.125 18.651,29.093 18.483,28.925 17.233,28.925 ; SCLo.1@15.063,25.127 SCLo.1@14.819,25.371 16.271,25.371 ; 16.271,25.371 17.058,26.158 17.058,28.75 ; 16.883,28.925 17.233,28.925 ; 16.883,28.925 17.058,28.75 ; 17.058,28.75 17.233,28.925
I2C1SDA: R26.2 SDAo.1 U1.24 U5.6 U6.7 | length 44.2
  Top Layer w0.2: R26.2@12.169,29.015 ccw(c11.75,29.434) 12.342,29.434 ; U6.7@12.219,29.798 cw(c11.92,29.499) 12.342,29.499 cw(c12.765,29.499) U6.7@12.466,29.798 ; U6.7@12.219,30.546 ccw(c11.92,30.844) 12.342,30.844 ccw(c12.765,30.844) U6.7@12.466,30.546 ; R26.2@12.342,28.838 U6.7@12.342,30.172 12.342,31.091 12.502,31.25 13.855,31.25 15.505,29.6 16.1,29.6 ; 12.342,29.449 ccw(c12.957,29.449) R26.2@12.522,29.015 ; 15.031,30.073 ccw(c15.65,30.692) v1@15.65,29.817 ; v1@15.791,29.476 cw(c16.092,29.175) 16.092,29.6 ; v1@15.806,29.742 ccw(c16.1,29.975) 16.1,29.6 ; U1.24@17.058,10.475 15.923,10.475 15.823,10.375 15.225,10.375 14.1,11.5 14.1,13.259 15.791,14.95 16.314,14.95 17.3,15.936 17.3,23.968 ; SDAo.1@17.345,24.298 cw(c17.105,24.163) 17.3,23.968 ; SDAo.1@17.63,24.013 ccw(c17.495,23.773) 17.3,23.968 ; SDAo.1@17.998,24.666 17.3,23.968 ; U5.6@18.251,30.125 18.251,29.493 18.158,29.4 16.3,29.4 16.1,29.6
  Bottom Layer w0.2: v1@15.509,29.476 cw(c15.167,29.134) 15.65,29.134 cw(c16.133,29.134) v1@15.791,29.476 ; v1(15.65,29.617) 15.65,27.015 SDAo.1@17.998,24.666 ; SDAo.1@17.248,24.666 ccw(c15.438,24.666) 16.718,25.947 ccw(c17.998,27.227) SDAo.1@17.998,25.416 ; SDAo.1@17.448,24.666 ccw(c16.121,24.666) 17.06,25.605 ccw(c17.998,26.544) SDAo.1@17.998,25.216
INT_ALT: INTa.1 JP2.1 U1.60 U6.6 | length 48.9
  Top Layer w0.2: U1.60@5.858,8.975 7.1,8.975 7.225,8.85 8.451,8.85 ; 8.574,8.973 ccw(c8.401,9.146) v1@8.646,9.146 ; v1@8.802,8.951 ccw(c8.718,8.583) 8.451,8.85 ; v1(8.846,9.146) 8.748,9.146 8.451,8.85 ; U6.6@10.969,29.798 cw(c10.67,29.499) 11.092,29.499 cw(c11.515,29.499) U6.6@11.216,29.798 ; JP2.1@11.026,28.073 cw(c10.599,27.646) 11.203,27.646 cw(c11.806,27.646) JP2.1@11.38,28.073 ; JP2.1@11.026,28.627 ccw(c10.866,28.787) JP2.1@11.092,28.787 ; JP2.1@11.092,28.4 U6.6@11.092,30.172 ; 11.092,28.837 ccw(c11.59,28.837) JP2.1@11.238,28.485 ; 11.092,29.32 ccw(c12.073,29.32) JP2.1@11.38,28.627 ; JP2.1@11.203,28.35 11.203,26.32 ; INTa.1@11.315,25.784 ccw(c10.849,25.966) 11.203,26.32 ; INTa.1@11.74,26.208 cw(c11.557,26.674) 11.203,26.32 ; INTa.1@12.013,24.76 cw(c12.013,22.949) 13.294,24.229 cw(c14.574,25.51) INTa.1@12.763,25.51 ; INTa.1@12.013,24.96 cw(c12.013,23.632) 12.952,24.571 cw(c13.891,25.51) INTa.1@12.563,25.51 ; v1(12.6,9.146) 13.1,9.646 v1(13.1,14.977) ; v1@12.6,9.346 ccw(c12.6,9.829) 12.941,9.488 ccw(c13.283,9.146) v1@12.8,9.146 ; v1@12.959,14.836 cw(c12.617,14.495) 13.1,14.495 cw(c13.583,14.495) v1@13.241,14.836 ; v1(15.9,15.95) 16.5,16.55 16.5,22.95 15.579,23.871 13.652,23.871 INTa.1@12.013,25.51 11.203,26.32 ; v1@15.9,16.15 ccw(c15.9,16.633) 16.241,16.291 ccw(c16.583,15.95) v1@16.1,15.95
  Bottom Layer w0.2: v1(8.846,9.146) 12.546,9.146 12.6,9.2 v1(12.6,9.146) ; v1@8.988,9.005 cw(c9.329,8.663) 9.329,9.146 cw(c9.329,9.629) v1@8.988,9.288 ; v1@12.459,9.005 ccw(c12.117,8.663) 12.117,9.146 ccw(c12.117,9.629) v1@12.459,9.288 ; v1(13.1,14.977) 14.073,15.95 v1(15.9,15.95) ; v1@13.1,15.177 ccw(c13.1,15.66) 13.441,15.319 ccw(c13.783,14.977) v1@13.3,14.977 ; 15.417,15.95 cw(c15.417,15.467) v1@15.758,15.808 ; 15.417,15.95 ccw(c15.417,16.432) v1@15.758,16.091
INT_IMU: INTIMU.1 U1.6 U4.12 | length 51.7
  Top Layer w0.2: U1.6@10.208,5.125 10.208,7.892 10.2,7.9 12.05,9.75 v1(12.05,14.05) ; v1@11.909,13.909 cw(c11.567,13.567) 12.05,13.567 cw(c12.533,13.567) v1@12.191,13.909 ; v1@20.759,17.391 ccw(c20.417,17.733) 20.9,17.733 ccw(c21.383,17.733) v1@21.041,17.391 ; v1(20.9,17.25) 20.9,19.617 20.004,20.513 20.004,26.86 20.95,27.806 ; U4.12@23.124,27.071 23.124,27.602 22.784,27.942 21.086,27.942 ; INTIMU.1@28.126,28.817 ccw(c26.845,27.536) 26.845,29.347 ccw(c26.845,31.157) INTIMU.1@28.126,29.877 ; INTIMU.1@28.267,28.958 ccw(c27.328,28.019) 27.328,29.347 ccw(c27.328,30.675) INTIMU.1@28.267,29.736 ; INTIMU.1@28.656,29.347 25.753,29.347 25.35,29.75 21.584,29.75 20.95,29.116 20.95,28.078 ; 20.95,27.806 20.95,28.078 ; 20.95,27.806 21.086,27.942 ; 20.95,28.078 21.086,27.942
  Bottom Layer w0.2: v1(12.05,14.05) 13.021,14.05 14.321,15.35 15.651,15.35 16.3,15.35 18.2,17.25 v1(20.9,17.25) ; v1@12.191,13.909 cw(c12.533,13.567) 12.533,14.05 cw(c12.533,14.533) v1@12.191,14.191 ; v1@20.759,17.109 ccw(c20.417,16.767) 20.417,17.25 ccw(c20.417,17.733) v1@20.759,17.391
INT_MAG: INTm.1 U1.59 U5.9 | length 42.3
  Top Layer w0.2: U1.59@5.858,9.475 7.2,9.475 7.425,9.25 8.048,9.25 8.401,9.603 8.401,12.7 8.15,12.951 8.15,13.276 v1(8.04,13.386) ; v1@7.97,13.199 cw(c7.871,12.938) 8.15,12.938 ; v1(17.6,15.25) 17.7,15.35 17.7,20.652 ; 17.852,20.804 cw(c18.069,20.586) INTm.1@18.271,20.819 ; INTm.1@17.885,21.164 cw(c17.247,21.105) 17.7,20.652 ; INTm.1@18.14,20.668 ccw(c17.928,20.424) 17.7,20.652 ; INTm.1@18.232,21.184 17.7,20.652 ; U5.9@19.451,30.125 19.451,28.179 ; v1@19.49,28.013 ccw(c19.337,28.064) 19.451,28.179 ; v1@19.617,28.14 cw(c19.565,28.293) 19.451,28.179 ; v1(19.68,27.95) 19.451,28.179
  Bottom Layer w0.2: v1@8.168,13.54 ccw(c8.262,13.656) 8.368,13.55 ; v1@8.182,13.244 cw(c8.919,12.507) 8.919,13.55 ; 8.437,13.55 ccw(c8.437,12.99) v1(8.04,13.386) 8.076,13.35 8.168,13.35 8.368,13.55 ; v1@17.4,15.25 cw(c16.917,15.25) 17.259,14.909 cw(c17.6,14.567) v1@17.6,15.05 ; v1(17.6,15.25) 17.25,14.9 14.457,14.9 12.957,13.4 10.043,13.4 9.893,13.55 8.368,13.55 ; INTm.1@18.232,21.184 19.68,22.632 ; INTm.1@18.632,21.984 ccw(c18.632,22.95) 19.315,22.267 ; INTm.1@18.97,21.324 cw(c19.788,21.542) 19.189,22.142 ; INTm.1@19.163,21.376 cw(c20.176,21.646) 19.435,22.387 ; INTm.1@19.356,21.427 cw(c20.563,21.749) 19.68,22.632 ; v1@19.538,27.809 cw(c19.197,27.467) 19.68,27.467 cw(c20.163,27.467) v1@19.821,27.809 ; v1(19.68,27.95) 19.68,22.632
MVDD: B2.2 C10.1 C11.1 C12.1 C13.1 C14.1 C15.1 C16.1 C42.1 MVDD.1 P4.1 R15.1 R16.1 U1.2 U1.11 U1.26 U1.37 U1.42 U1.54 | length 52.3
  Top Layer w0.2: R15.1@2.549,34.568 cw(c2.038,33.936) v1@2.85,33.936 ; R15.1@2.556,34.612 R15.1@2.85,34.612 ; R15.1@2.674,34.723 cw(c2.377,34.355) 2.85,34.355 ; v1(2.95,33.95) 2.95,33.849 2.85,33.949 R15.1@2.85,34.612 ; v1@3.082,34.1 cw(c3.531,34.612) R15.1@2.85,34.612 ; C16.1@4.197,12.442 4.639,12 ; C16.1@4.271,12.101 cw(c4.366,11.727) 4.639,12 ; C16.1@4.497,12.375 ccw(c4.986,12.346) 4.639,12 ; 5.026,12 cw(c5.026,11.793) U1.54@5.173,11.939 ; v1@5.722,27.878 P4.1@7.173,27.878 ; C10.1@5.724,19.1 ccw(c5.68,19.303) v1@5.777,19.488 ; v1(5.9,19.649) 5.9,19.063 C10.1@6.316,18.647 6.613,18.944 v1(6.613,19.633) ; v1@5.911,28.016 ccw(c6.152,28.379) P4.1@6.265,27.958 ; v1@5.941,27.709 cw(c6.35,27.3) P4.1@6.35,27.878 ; v1@5.941,27.991 ccw(c6.215,28.265) 6.215,27.878 ; v1@5.968,27.742 cw(c6.126,27.641) 6.175,27.822 ; v1@5.973,27.75 cw(c6.344,27.536) 6.233,27.95 ; v1@5.973,27.95 ccw(c6.184,28.072) 6.121,27.836 ; v1@6.025,19.487 ccw(c6.129,19.307) C10.1@6.1,19.1 ; P4.1@6.427,27.687 ccw(c5.966,27.226) 5.966,27.878 ccw(c5.966,28.53) P4.1@6.427,28.069 ; C10.1@6.437,19.084 ccw(c6.393,19.287) v1@6.49,19.472 ; v1@6.738,19.471 ccw(c6.842,19.291) C10.1@6.813,19.084 ; v1(7.1,11.85) 7.111,11.838 7.188,11.838 7.2,11.85 7.2,11.95 7.225,11.975 U1.54@5.858,11.975 5.833,12 4.639,12 ; C42.1@7.641,3.049 ccw(c7.23,3.7) v1(8,3.7) ; C42.1@7.748,2.88 ccw(c7.459,3.337) 8,3.337 ; C42.1@7.786,2.721 8,2.936 v1(8,3.7) ; v1@7.843,3.576 cw(c7.61,3.392) 7.897,3.315 cw(c8.184,3.238) v1@8.074,3.514 ; v1@7.859,3.559 cw(c7.517,3.217) 8,3.217 cw(c8.483,3.217) v1@8.141,3.559 ; U1.2@8.208,5.125 8.208,3.908 v1(8,3.7) ; C12.1@10.708,18.12 U1.42@10.708,16.325 10.708,15 v1(10.9,15) ; C15.1@12.127,3.026 ccw(c11.704,3.7) v1(12.5,3.7) ; C15.1@12.233,2.856 ccw(c11.931,3.339) 12.5,3.339 ; C15.1@12.286,2.721 12.5,2.936 v1(12.5,3.7) ; v1@12.34,3.58 cw(c12.08,3.386) 12.393,3.302 ; v1@12.359,3.559 cw(c12.017,3.217) 12.5,3.217 cw(c12.983,3.217) v1@12.641,3.559 ; 12.393,3.302 cw(c12.706,3.218) v1@12.579,3.516 ; U1.11@12.708,5.125 12.708,3.908 v1(12.5,3.7) ; v1@13.067,17.65 cw(c12.725,17.309) 13.208,17.309 cw(c13.691,17.309) v1@13.35,17.65 ; U1.37@13.208,16.325 v1(13.208,17.792) 13.536,18.12 ; v1@13.214,17.992 ccw(c13.227,18.429) 13.536,18.12 ; v1@13.408,17.798 cw(c13.845,17.81) 13.536,18.12 ; 13.672,18.12 cw(c13.672,17.613) C13.1@14.03,17.971 ; C13.1@13.997,18.357 cw(c13.536,18.686) 13.536,18.12 ; C13.1@14.242,18.12 13.536,18.12 ; U1.26@17.058,11.475 18.875,11.475 C14.1@19.05,11.65 ; C14.1@19.05,11.784 cw(c19.713,11.121) v1@19.826,12.051 ; C14.1@19.304,12.071 ccw(c19.359,12.359) v1@19.634,12.256 ; v1@19.8,12.2 v1(19.85,12.25) v1@20.006,12.25 ; R16.1@20.009,15.688 20.688,15.688 ; R16.1@20.185,15.512 cw(c20.612,15.085) 20.612,15.688 cw(c20.612,16.292) R16.1@20.185,15.865 ; v1@20.698,15.92 cw(c20.567,15.809) 20.688,15.688 ; v1(20.85,16.05) 20.85,15.85 20.688,15.688 ; C11.1@23.692,10.692 24.15,11.15 24.15,11.85 ; C11.1@23.832,11.388 ccw(c23.656,11.85) 24.15,11.85 ; C11.1@23.903,11.201 ccw(c23.766,11.56) 24.15,11.56 ; 24.15,11.671 ccw(c24.695,11.671) C11.1@24.31,11.286 ; B2.2@26.016,12.98 ccw(c25.504,12.468) 25.504,13.192 ccw(c25.504,13.916) B2.2@26.016,13.404 ; B2.2@26.278,13.192 25.492,13.192 24.15,11.85
  Top Layer w0.3: MVDD.1@23.237,8.762 23.237,9.237 23.692,9.692 ; MVDD.1@23.337,8.754 23.692,9.108 23.692,9.692 ; C11.1@23.409,10.685 cw(c22.726,10.002) 23.692,10.002 cw(c24.657,10.002) C11.1@23.974,10.685 ; C11.1@23.692,10.692 23.692,9.692
  Bottom Layer w0.2: v1@2.95,33.85 v1(2.95,33.95)
  other v1: 5.8,27.85
Net\RST_1: \RST.1 C19.1 P4.10 R16.2 R17.1 U1.38 | length 53.1
  Top Layer w0.2: \RST.1@6.455,25.583 7.288,24.75 8.266,24.75 8.95,24.066 8.95,22.687 7.502,21.238 7.502,19.603 ; v1@7.81,19.554 cw(c7.689,19.791) 7.502,19.603 ; v1@7.9,19.205 7.502,19.603 ; v1(12.4,17.65) 12.502,17.65 12.708,17.443 ; v1@12.495,17.474 cw(c12.581,17.316) 12.708,17.443 ; v1@12.6,17.65 ccw(c12.837,17.65) 12.669,17.482 ; U1.38@12.708,16.325 12.708,17.443 ; R17.1@18.332,16.656 cw(c17.905,16.229) 18.509,16.229 cw(c19.112,16.229) R17.1@18.685,16.656 ; R17.1@18.332,17.209 ccw(c17.905,17.636) 18.509,17.636 ccw(c19.112,17.636) R17.1@18.685,17.209 ; R16.2@18.332,15.965 ccw(c17.905,16.392) 18.509,16.392 ccw(c19.112,16.392) R16.2@18.685,15.965 ; C19.1@18.346,17.977 cw(c17.955,17.585) 18.509,17.585 ; C19.1@18.346,18.501 ccw(c17.639,19.208) v1@18.639,19.208 ; v1@18.459,19.133 cw(c18.001,18.868) 18.512,18.731 ; C19.1@18.488,18.359 ccw(c18.122,18.725) 18.639,18.725 ; v1@18.49,19.092 cw(c18.13,18.732) 18.639,18.732 ; R17.1@18.509,17.344 cw(c19.404,17.344) C19.1@18.771,17.977 ; C19.1@18.509,18.219 R16.2@18.509,15.688 R16.2@18.518,15.688 ; 18.529,18.796 cw(c18.949,18.683) v1@18.732,19.06 ; v1(18.632,19.233) 18.639,19.225 C19.1@18.639,18.239 ; 18.639,18.769 cw(c19.096,18.769) v1@18.773,19.092 ; 18.639,18.818 ccw(c19.088,18.818) C19.1@18.771,18.501
  Top Layer w0.3: P4.10@2.931,32.958 3.742,32.958 v1(4.35,32.35) ; P4.10@3.486,32.738 cw(c3.486,31.589) v1@4.299,32.401 ; 4.006,32.57 cw(c3.793,32.201) v1@4.205,32.311 ; 4.085,32.525 ccw(c4.234,32.783) v1@4.311,32.495 ; v1@4.2,32.35 ccw(c3.838,32.35) 4.094,32.606 ccw(c4.35,32.862) v1@4.35,32.5
  Bottom Layer w0.2: v1@7.758,19.234 cw(c7.417,18.893) 7.9,18.893 cw(c8.383,18.893) v1@8.041,19.234 ; v1(7.9,19.375) 7.9,18.5 8.75,17.65 v1(12.4,17.65) 12.4,18.1 ; v1@12.258,17.508 ccw(c11.917,17.167) 11.917,17.65 ccw(c11.917,18.133) v1@12.258,17.791 ; v1@12.266,17.798 ccw(c11.994,18.1) 12.4,18.1 ; v1@12.534,17.798 cw(c12.806,18.1) 12.4,18.1 ; v1@18.432,19.233 cw(c17.949,19.233) 18.29,18.892 cw(c18.632,18.55) v1@18.632,19.033 ; v1(18.632,19.233) 18.049,18.65 12.95,18.65 12.4,18.1
  Bottom Layer w0.3: v1@4.244,32.244 cw(c3.988,31.988) 4.35,31.988 cw(c4.712,31.988) v1@4.456,32.244 ; v1(4.35,32.35) 4.35,31.85 6.55,29.65 6.55,25.679 \RST.1@6.455,25.583 ; \RST.1@5.96,26.078 ccw(c4.534,27.503) 6.55,27.503 ; \RST.1@6.172,25.866 ccw(c5.259,26.779) 6.55,26.779 ; 6.55,27.043 ccw(c7.914,27.043) \RST.1@6.95,26.078
NetASS_1: ASS.1 P1.2 R1.1 U1.20 | length 56.5
  Top Layer w0.2: U1.20@17.058,8.475 20.657,8.475 21.8,9.617 21.8,13.495 21.6,13.695 21.6,14.176 23.274,15.85 29.563,15.85 33.55,19.837 v1(33.55,21.097) ; v1@33.409,20.955 cw(c33.067,20.614) 33.55,20.614 cw(c34.033,20.614) v1@33.691,20.955 ; P1.2@34.214,36.001 cw(c33.646,35.433) 34.45,35.433 ; P1.2@34.427,36.563 34.45,36.54 34.45,35.416 38.155,31.711 R1.1@38.155,30.201 36.466,30.201 ASS.1@35.728,29.463 ; 34.45,35.546 cw(c35.094,35.546) P1.2@34.639,36.001 ; ASS.1@35.842,29.95 ccw(c36.018,30.271) 36.278,30.012 ; ASS.1@35.938,30.125 ccw(c36.152,30.515) 36.466,30.201 ccw(c36.888,29.779) ASS.1@36.308,29.641 ; R1.1@37.878,30.024 ccw(c37.451,29.597) 37.451,30.201 ccw(c37.451,30.804) R1.1@37.878,30.378 ; R1.1@37.978,30.378 ccw(c37.551,30.804) 38.155,30.804 ccw(c38.759,30.804) R1.1@38.332,30.378
  Bottom Layer w0.2: v1(33.55,21.097) 34.4,21.947 34.4,25.622 34.25,25.772 34.25,28.139 ASS.1@35.578,29.467 ; v1@33.55,21.297 ccw(c33.55,21.78) 33.891,21.438 ccw(c34.233,21.097) v1@33.75,21.097 ; ASS.1@34.828,29.467 cw(c33.018,29.467) 34.298,28.187 cw(c35.578,26.907) ASS.1@35.578,28.717 ; ASS.1@35.028,29.467 cw(c33.7,29.467) 34.639,28.528 cw(c35.578,27.59) ASS.1@35.578,28.917
NetC4_1: C4.1 C5.1 C6.1 C7.1 C8.1 C9.1 U1.25 U1.56 VDDC.1 | length 42
  Top Layer w0.2: VDDC.1@2.879,3.433 ccw(c2.919,4.256) 3.502,3.673 ; VDDC.1@2.889,3.633 ccw(c2.949,4.865) 3.821,3.993 ; VDDC.1@2.898,3.832 ccw(c2.978,5.474) 4.14,4.312 ; VDDC.1@2.912,3.083 4.14,4.312 ; VDDC.1@3.412,3.083 cw(c4.619,3.083) 3.765,3.937 ; VDDC.1@3.612,3.083 cw(c5.302,3.083) 4.107,4.278 ; C4.1@3.92,7.72 cw(c3.404,7.203) 4.134,7.203 ; C4.1@3.92,8.244 ccw(c3.404,8.761) 4.134,8.761 ; C7.1@3.922,6.427 cw(c3.395,5.9) 4.14,5.9 ; C7.1@3.922,6.952 ccw(c3.41,7.464) 4.134,7.464 ccw(c4.858,7.464) C7.1@4.346,6.952 ; C9.1@3.922,10.263 cw(c3.408,9.75) 4.134,9.75 ; C5.1@3.928,5.127 cw(c3.416,4.615) 4.14,4.615 cw(c4.865,4.615) C5.1@4.353,5.127 ; C5.1@3.928,5.652 ccw(c3.416,6.164) 4.14,6.164 ccw(c4.865,6.164) C5.1@4.353,5.652 ; C6.1@3.938,8.977 cw(c3.464,8.503) 4.134,8.503 ; C6.1@3.938,9.501 ccw(c3.464,9.975) 4.134,9.975 ; C4.1@3.982,8.292 ccw(c3.792,8.622) 4.16,8.523 ; 4.134,7.212 cw(c4.852,7.212) C4.1@4.344,7.72 ; C4.1@4.134,8.427 cw(c4.913,8.427) C6.1@4.362,8.977 ; 4.134,8.752 ccw(c4.852,8.752) C4.1@4.344,8.244 ; 4.134,9.752 cw(c4.857,9.752) C9.1@4.346,10.263 ; 4.134,10.052 ccw(c4.913,10.052) C6.1@4.362,9.501 ; 4.14,5.93 cw(c4.843,5.93) C7.1@4.346,6.427 ; 4.193,8.648 ccw(c4.547,8.553) C4.1@4.319,8.267 ; U1.56@6.585,10.975 ccw(c6.585,11.714) v1@7.108,11.191 ; 6.949,10.975 cw(c6.949,10.749) v1@7.108,10.908 ; v1@7.25,10.975 7.251,10.976 7.251,11.176 7.25,11.176 v1(7.25,11.05) 7.175,10.975 U1.56@5.858,10.975 4.764,10.975 4.664,10.875 4.485,10.875 C9.1@4.134,10.525 4.134,9.239 C7.1@4.134,6.689 4.14,6.683 C5.1@4.14,5.389 4.14,4.312 ; v1(15.6,11) 15.6,11.149 15.775,10.975 U1.25@17.058,10.975 ; v1@15.741,10.858 cw(c16.022,10.578) 16.022,10.975 ; v1@15.741,11.141 ccw(c16.144,11.544) 16.144,10.975
  Top Layer w0.254: U1.25@17.058,10.975 C8.1@18.75,10.975
  Bottom Layer w0.2: v1@15.6,10.975 v1(15.6,11)
  Bottom Layer w0.4: v1(7.25,11.05) 7.25,11.076 7.251,11.076 7.251,10.976 7.25,10.975 v1@15.6,10.975 ; v1@7.321,11.121 ccw(c7.673,11.473) 7.673,10.975 ; 15.297,10.975 ccw(c15.297,11.302) v1@15.529,11.071
NetC17_1: C17.1 U1.40 Y1.1 | length 11.7
  Top Layer w0.2: U1.40@11.708,16.325 11.708,17.807 12.401,18.5 13.25,18.5 13.442,18.692 13.442,19.249 13.792,19.6 Y1.1@13.892,19.6 ; 13.442,18.799 cw(c13.995,18.799) Y1.1@13.942,19.349 ; 13.442,19.019 cw(c13.974,19.019) Y1.1@13.923,19.548 ; Y1.1@13.442,19.239 cw(c13.952,19.239) Y1.1@13.904,19.747 ; Y1.1@13.916,19.748 14.077,19.586 C17.1@15.505,19.586 ; Y1.1@14.11,19.428 cw(c14.49,19.048) Y1.1@14.49,19.586 ; Y1.1@14.11,19.817 ccw(c14.668,20.376) 14.668,19.586 ; Y1.1@14.251,19.287 cw(c14.973,18.565) 14.973,19.586 ; C17.1@15.243,19.374 ccw(c14.731,18.862) 14.731,19.586 ccw(c14.731,20.31) C17.1@15.243,19.798